# Altium PCB sar20-motor-driver.PcbDoc
Units mm, origin at the board's own origin, x right, y up, seen from the top; angles counter-clockwise.
Board outline 27 x 25.1 mm, 4 copper layers (Top Layer, GND, PWR, Bottom Layer), stack 1.588 mm thick; 63 components, 53 nets, 265 pads, 118 vias.
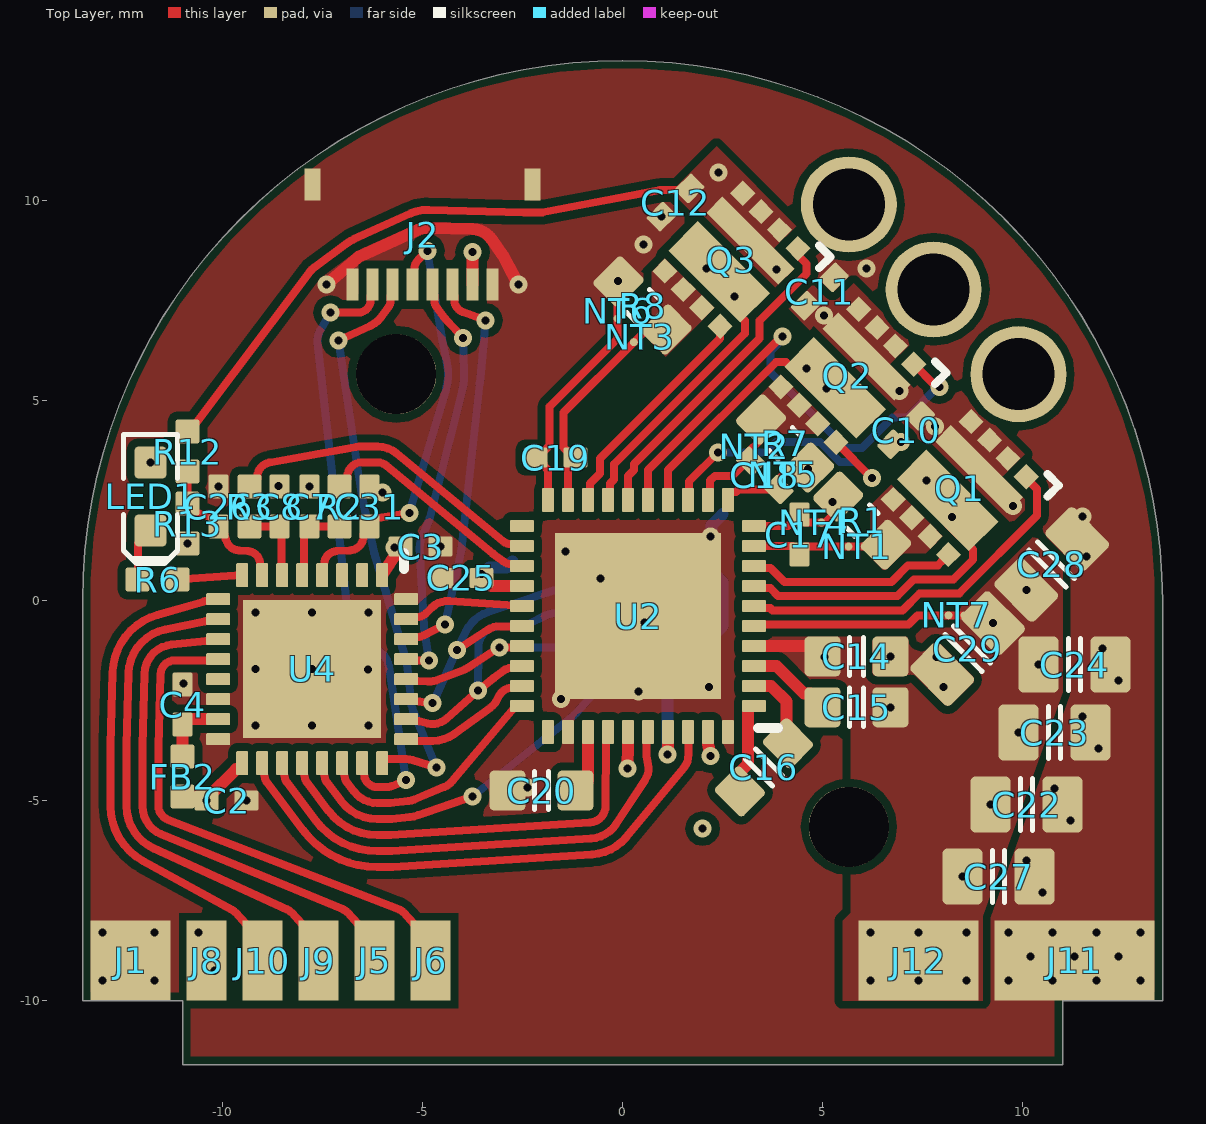
[diagram p0: Top Layer view]
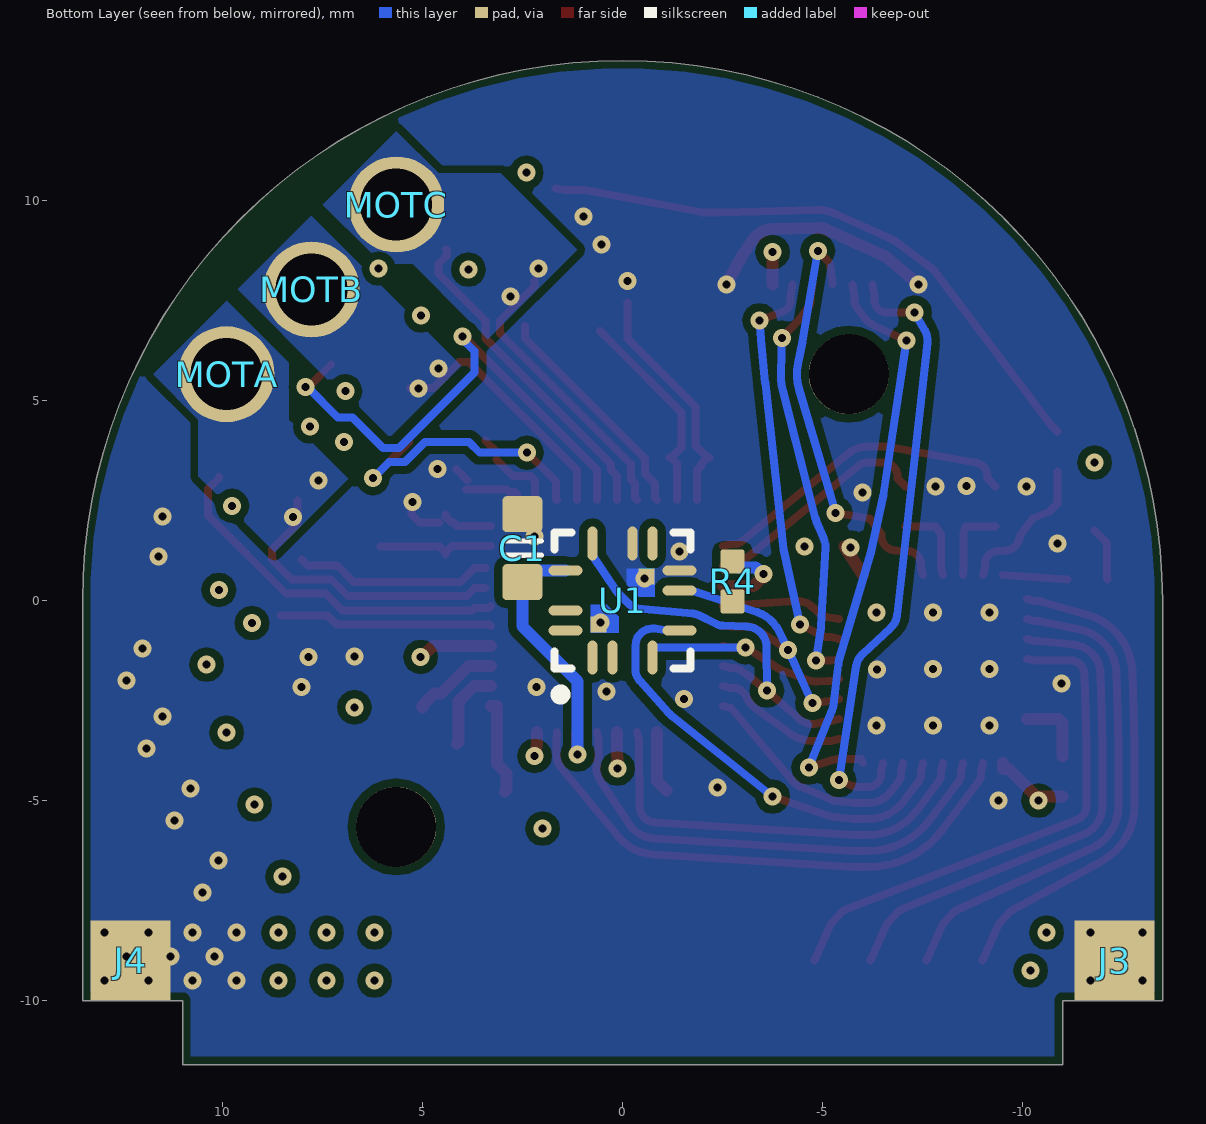
[diagram p1: Bottom Layer view, seen from below]
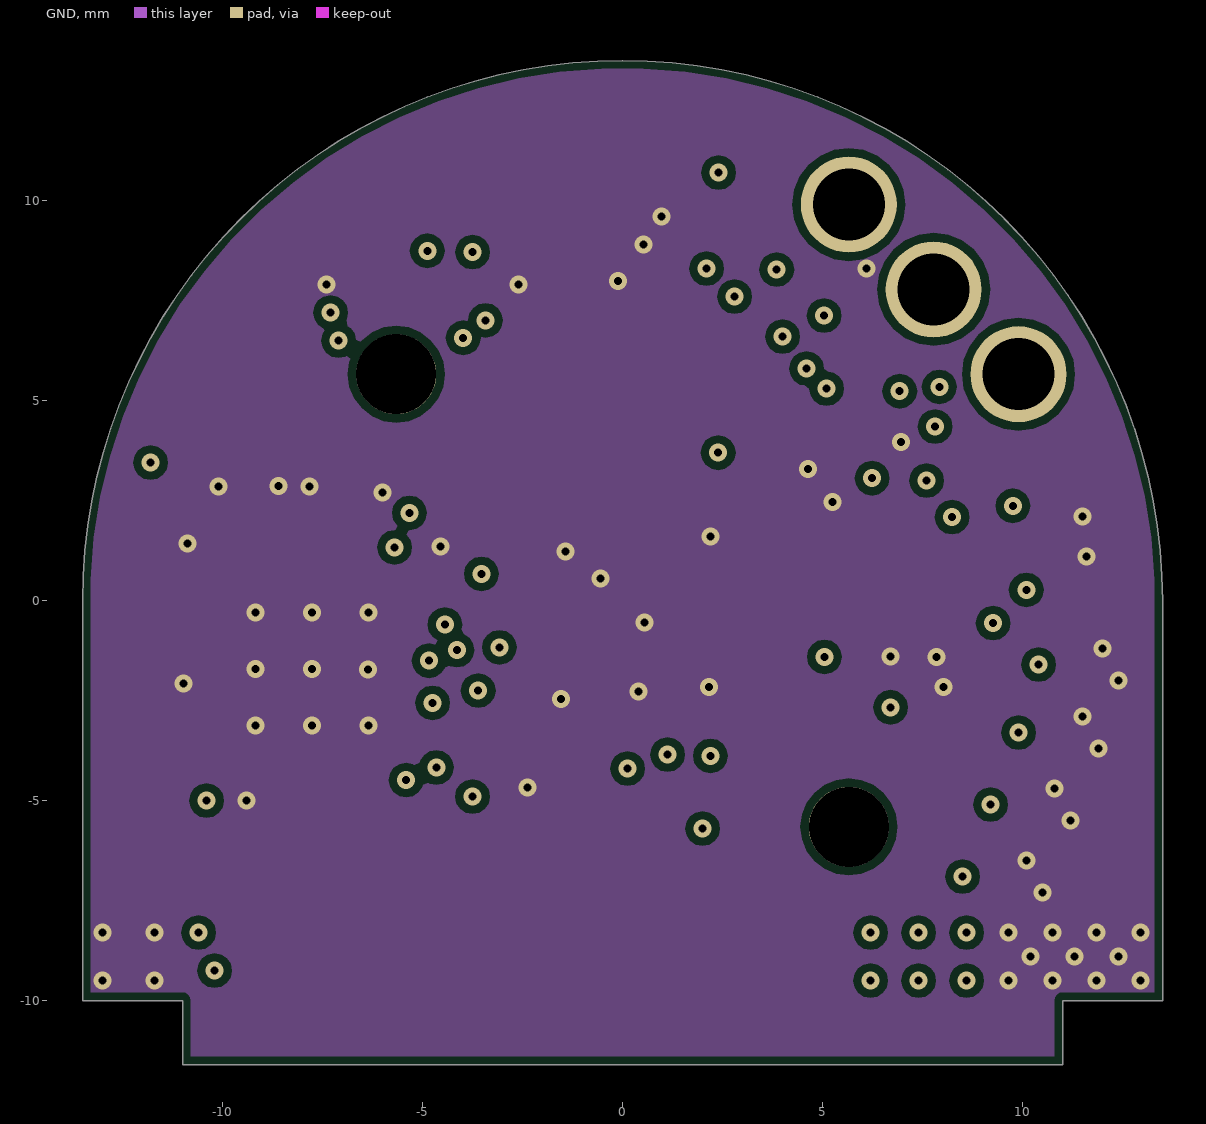
[diagram p2: GND]
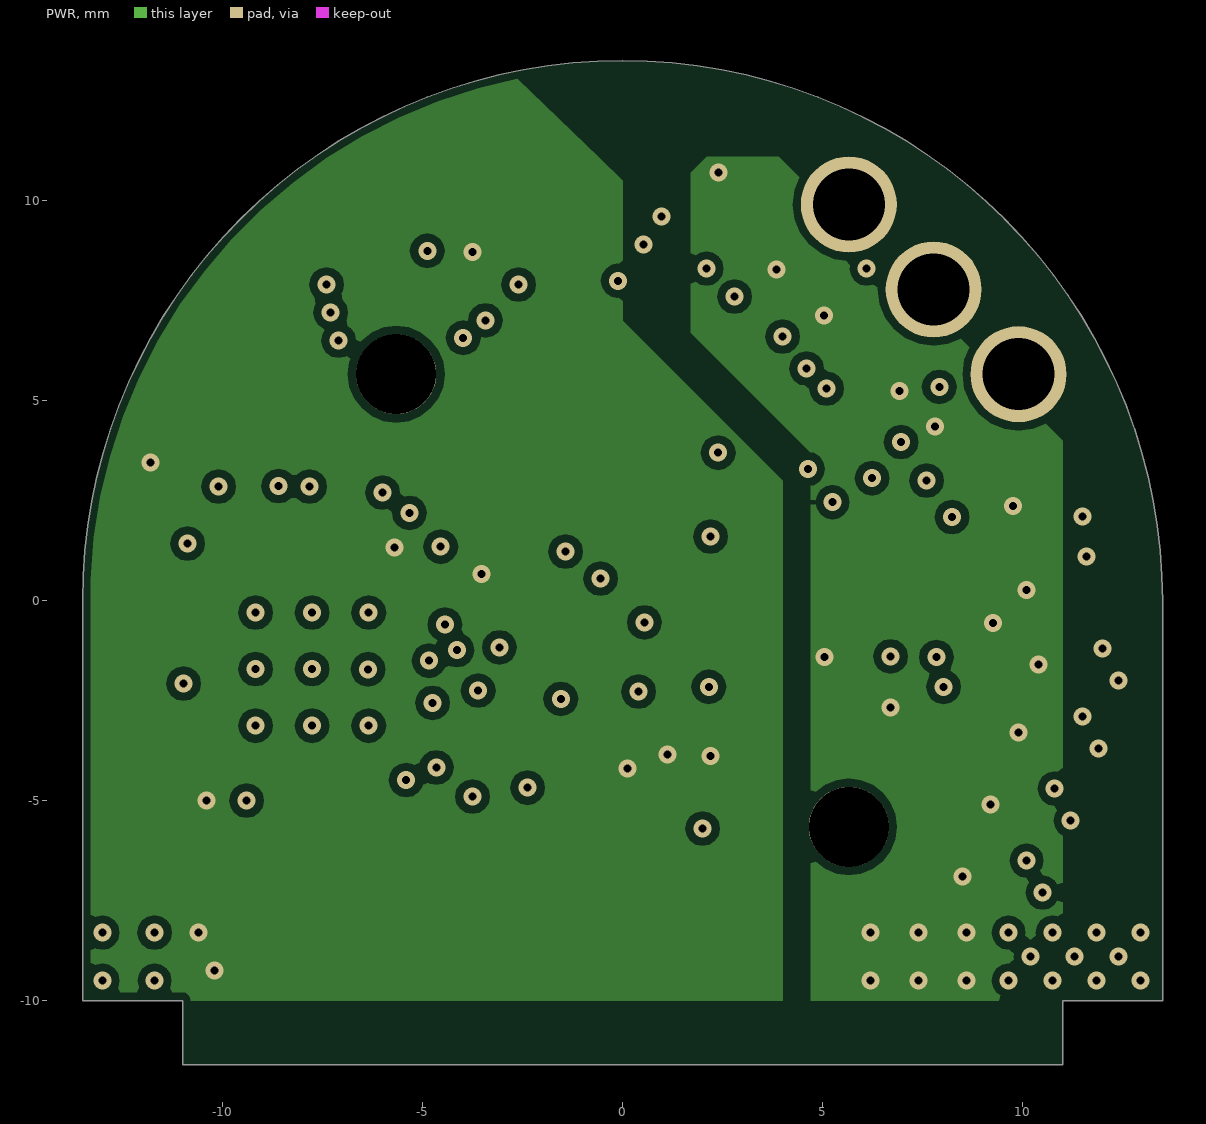
[diagram p3: PWR]
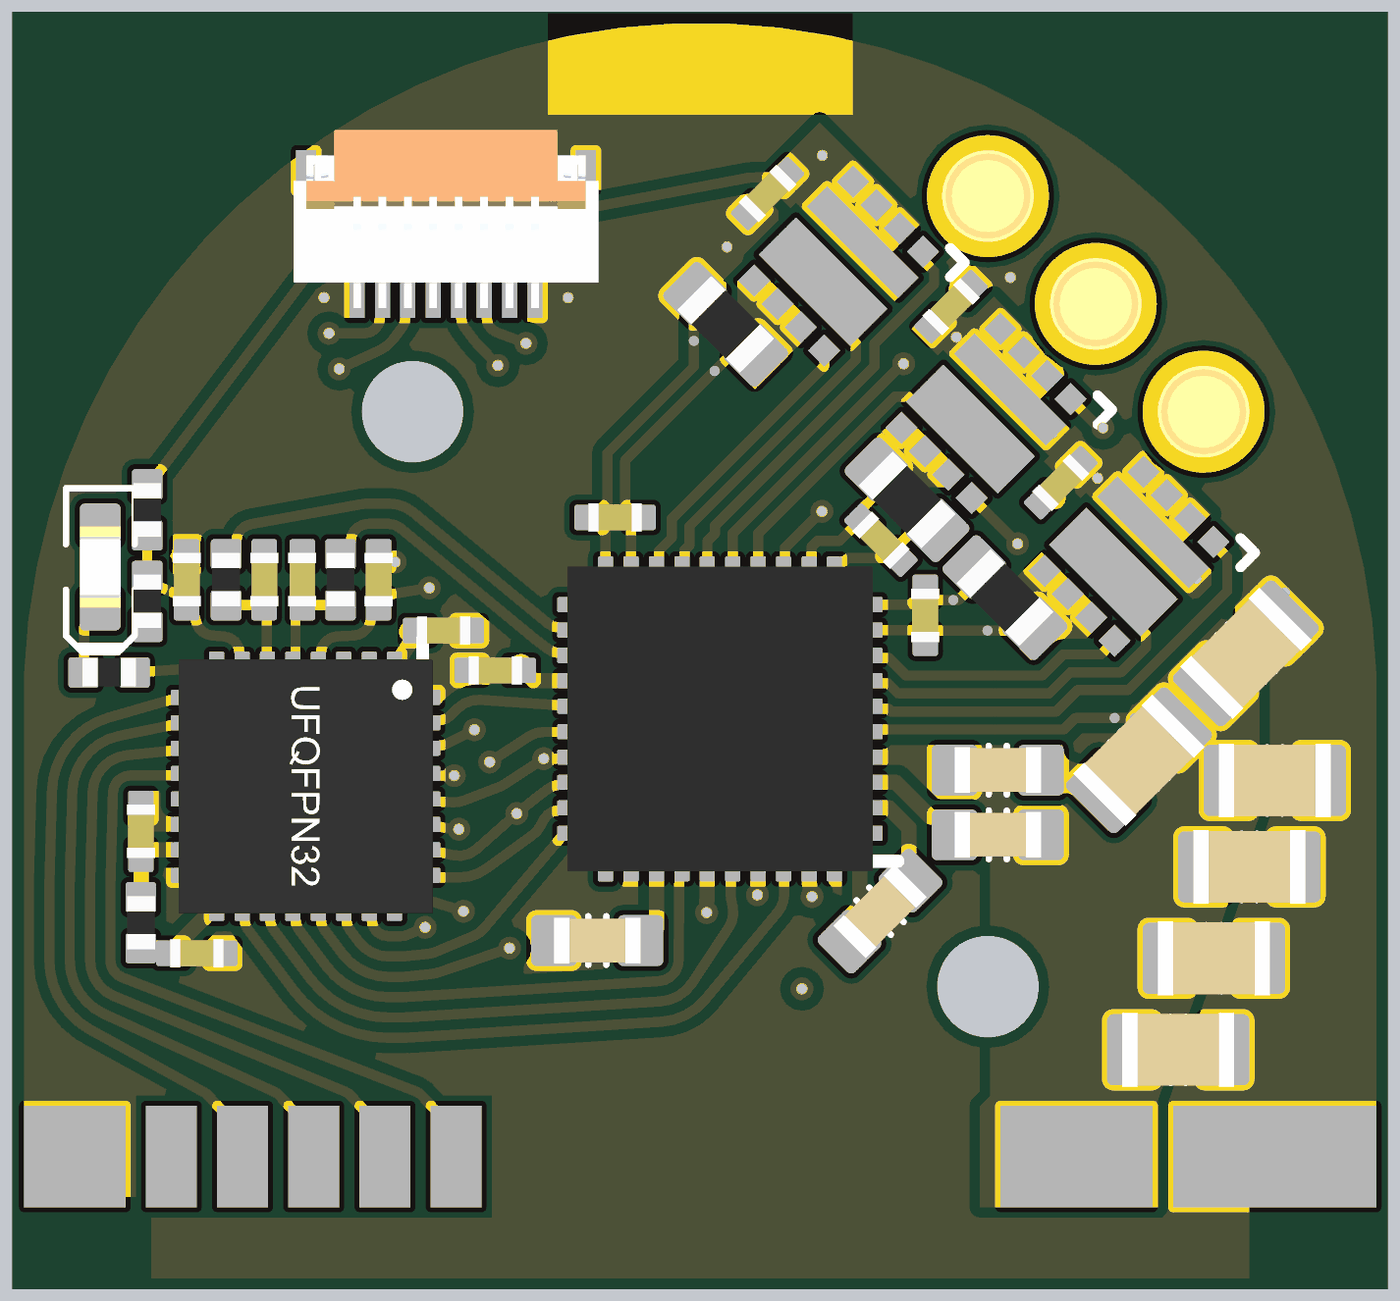
[diagram p4: 3D render of the assembled board from above, using the file's embedded part models]
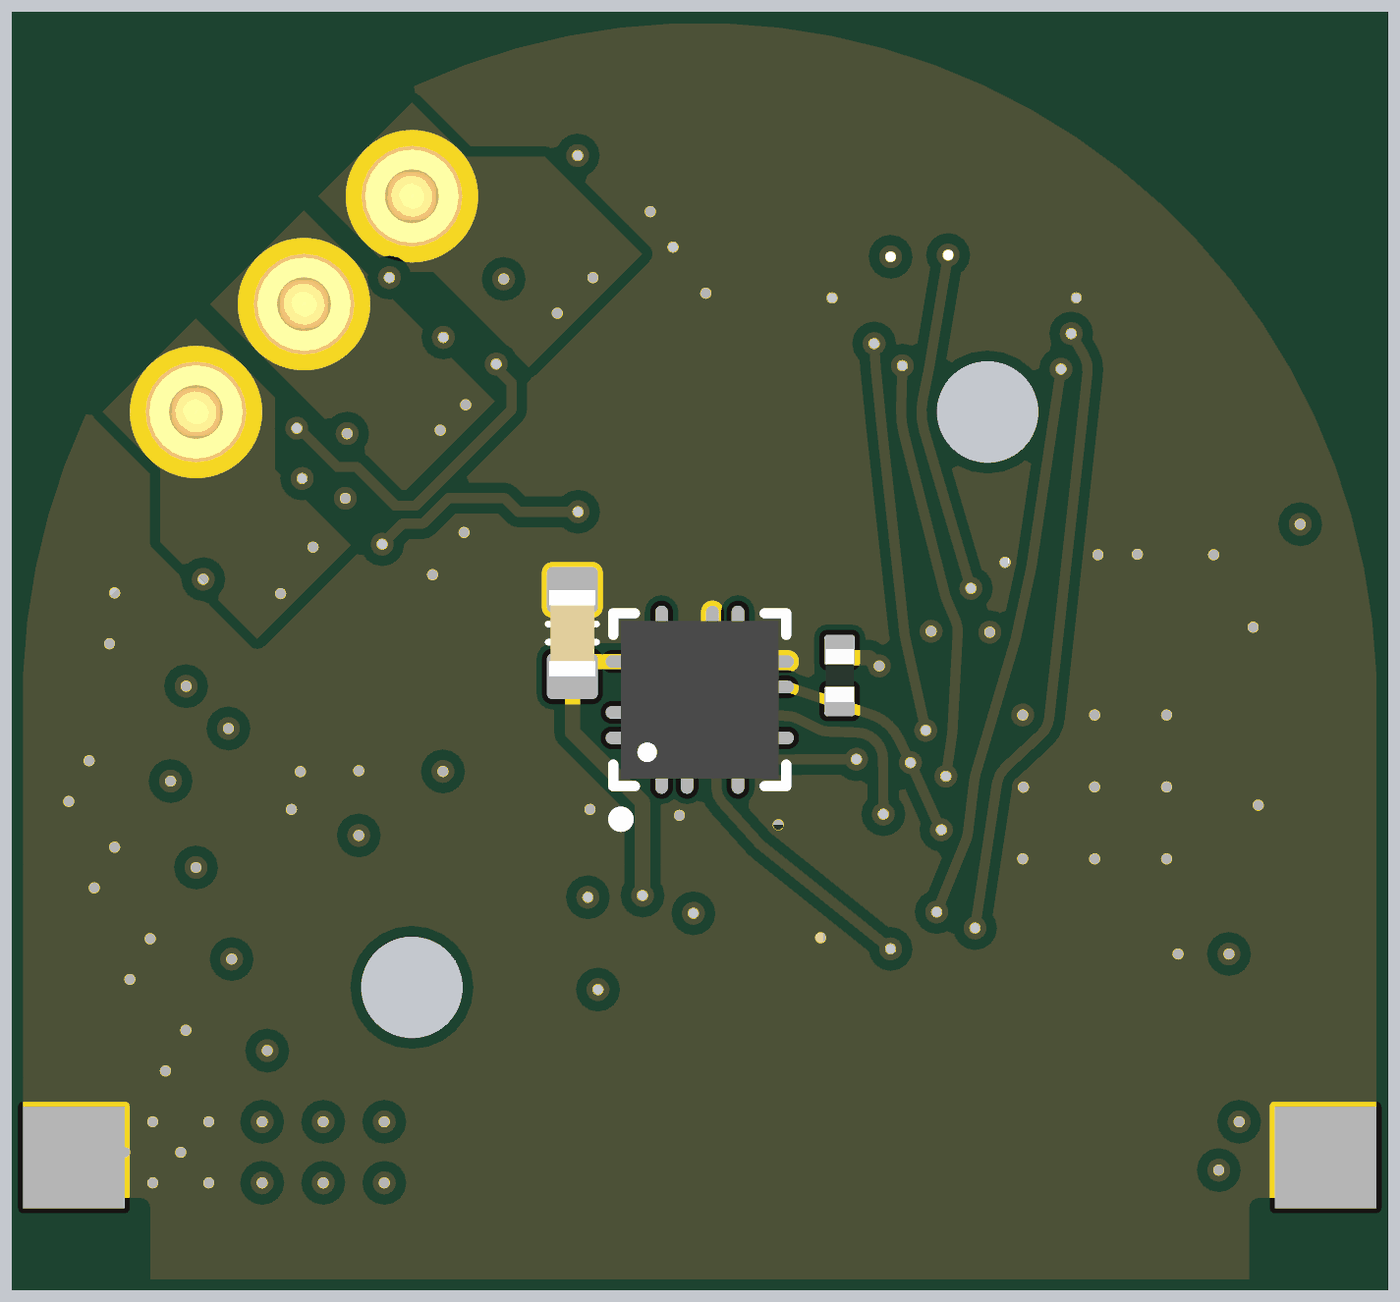
[diagram p5: 3D render of the assembled board from below, using the file's embedded part models]

## Layer stack, top to bottom
Top Solder: solder mask 0.0102, Solder Resist, Dk 3.5
Top Layer: signal copper 0.035
Dielectric 2: prepreg 0.2083, PP-022, Dk 4.5
GND: signal copper 0.018
Dielectric 1: core 1.065, Core-042, Dk 4.6
PWR: signal copper 0.018
Dielectric 3: prepreg 0.2083, PP-022, Dk 4.5
Bottom Layer: signal copper 0.035
Bottom Solder: solder mask 0.0102, Solder Resist, Dk 3.5

## Board outline
-11,-11.6 11,-11.6 11,-10 13.5,-10 13.5,0 ccw(c0,0) 0,13.5 ccw(c0,0) -13.5,0 -13.5,-10 -11,-10

## Design rules (kind name [scope] priority, off if disabled: settings)
BoardOutlineClearance [All] p1: gap=0.2 ignorepadtopadclearanceinfootprint=FALSE except(0: Arc-SplitContinuation Track-SplitContinuation SMDPad-SplitContinuation THPad-SplitContinuation Via-SplitContinuation Fill-SplitContinuation Poly-SplitContinuation Region-SplitContinuation Text-SplitContinuation)
Clearance [All] p1: gap=0.2 ignorepadtopadclearanceinfootprint=FALSE except(0.127: SMDPad-SMDPad; 0.15: Track-Track)
ComponentClearance ComponentClearanceIgnore [Id = 'jd_power_my2813c' vs Id = 'M2x5_torx'] p1: gap=0 collisioncheckmode=3 verticalgap=0 showdistances=FALSE
ComponentClearance [not IsNetTieComponent and not HasFootprint('PAD-2020') and not HasFootprint('PAD-1020') vs not IsNetTieComponent and not HasFootprint('PAD-2020') and not HasFootprint('PAD-1020')] p2: gap=0.19 collisioncheckmode=3 verticalgap=0 showdistances=FALSE
DiffPairsRouting [All] p1: maxlimit=0.2 minlimit=0.2 mostfreqgap=0.2 toplayer_minwidth=0.2 toplayer_maxwidth=0.4 toplayer_prefwidth=0.3 midlayer1_minwidth=0.2 midlayer1_maxwidth=0.4 midlayer1_prefwidth=0.3 midlayer2_minwidth=0.2 midlayer2_maxwidth=0.4 midlayer2_prefwidth=0.3 bottomlayer_minwidth=0.2 bottomlayer_maxwidth=0.4 bottomlayer_prefwidth=0.3 maxuncoupledlength=10
HoleSize [All] p1: absolutevalues=TRUE maxlimit=5 minlimit=0.2 maxpercent=80.000 minpercent=20.000
HoleToHoleClearance [All] p1: gap=0.5 allowstackedmicrovias=FALSE
MinimumSolderMaskSliver [All] p1: minsoldermaskwidth=0.2
PlaneClearance [All] p1: clearance=0.2
PlaneConnect [All] p1: planeconnectstyle=Direct reliefexpansion=0.5 reliefentries=4 reliefconductorwidth=0.3 reliefairgap=0.2
PolygonConnect [All] p1: connectstyle=Direct reliefconductorwidth=0.3 reliefentries=4 polygonreliefangle="90 Angle" airgapwidth=0.2
RoomDefinition sar20-motor-driver [InComponentClass('sar20-motor-driver')] p1: confinementstyle=ConfineIn formatcopy=TRUE lockcomponents=FALSE outline -20,-21 39.6,-21 39.6,25.4 -20,25.4
RoutingVias [All] p1: holewidth=0.2 width=0.45 viastyle="Through Hole" minholewidth=0.2 minwidth=0.45 maxholewidth=3 maxwidth=5
SilkToSilkClearance [All] p1: silktosilkclearance=0.2
SilkToSolderMaskClearance [IsPad] p1: minsilkscreentomaskgap=0.2 clearancetoexposedcopper=TRUE
SolderMaskExpansion SolderMaskExpansionVia [IsVia] p1: expansion=0 istentingtop=TRUE useseparateexpansions=TRUE expansionbottom=0 istentingbottom=TRUE
SolderMaskExpansion [All] p2: expansion=0.1 istentingtop=FALSE
Width [All] p1: maxlimit=5 minlimit=0.2 preferedwidth=0.3
21 further rules are at their usual default settings.

## Components (designator, comment, footprint, x,y, rotation, side; value= is the part's Value field where it differs from the comment)
C1 "1u" CAPC1608X90N 2.504,1.309 r90 bottom
C2 "100n" CAPC1005X55N -9.9,-5 r0 top
C3 "100n" CAPC1005X55N -5.05,1.35 r0 top
C4 "100n" CAPC1005X55N -11,-2.6 r90 top
C7 "2.2n" CAPC1005X55N -7.825,2.35 r90 top
C8 "2.2n" CAPC1005X55N -8.575,2.35 r90 top
C10 "10n" CAPC1005X55N 7.089,4.26 r45 top
C11 "10n" CAPC1005X55N 4.932,7.725 r225 top
C12 "10n" CAPC1005X55N 1.325,9.95 r45 top
C14 "100n" CAPC1608X90N 5.851,-1.397 r0 top
C15 "1u" CAPC1608X90N 5.851,-2.669 r180 top
C16 "47n" CAPC1608X90N 3.536,-4.172 r225 top
C17 "1n" CAPC1005X55N 4.425,1.65 r90 top
C18 "1n" CAPC1005X55N 3.553,3.129 r315 top
C19 "1n" CAPC1005X55N -1.675,3.575 r180 top
C20 "1u" CAPC1608X90N -2.025,-4.75 r180 top
C22 "" CAPC2012X135N 10.1,-5.1 r0 top value=4.7u
C23 "" CAPC2012X135N 10.8,-3.3 r0 top value=4.7u
C24 "" CAPC2012X135N 11.3,-1.6 r0 top value=4.7u
C25 "100n" CAPC1005X55N -4.031,0.566 r180 top
C26 "2.2n" CAPC1005X55N -10.1,2.35 r90 top
C27 "" CAPC2012X135N 9.4,-6.9 r0 top value=4.7u
C28 "" CAPC2012X135N 10.73,0.902 r45 top value=4.7u
C29 "" CAPC2012X135N 8.627,-1.202 r225 top value=4.7u
C31 "100n" CAPC1005X55N -6.325,2.35 r90 top
FB2 "600R" RESC1005X40N -11,-4.4 r270 top
J1 "SOLDER-PAD" PAD-2020 -12.3,-9 r180 top
J2 "DEBUG" HIROSE-FH19C-8S-0.5SH -5,10.4 r180 top
J3 "SOLDER-PAD" PAD-2020 -12.3,-9 r180 bottom
J4 "SOLDER-PAD" PAD-2020 12.3,-9 r180 bottom
J5 "SOLDER-PAD" PAD-1020 -6.2,-9 r0 top
J6 "SOLDER-PAD" PAD-1020 -4.8,-9 r0 top
J8 "SOLDER-PAD" PAD-1020 -10.4,-9 r180 top
J9 "SOLDER-PAD" PAD-1020 -7.6,-9 r180 top
J10 "SOLDER-PAD" PAD-1020 -9,-9 r180 top
J11 "SOLDER-PAD" PAD-4020 11.3,-9 r180 top
J12 "SOLDER-PAD" PAD-3020 7.4,-9 r180 top
LED1 "White" LED-0603-WHITE -11.8,2.6 r270 top
MOTA "POGO-PIN" MILL-MAX_0921-0-15-20-76-14-11-0 9.899,5.657 r45 bottom
MOTB "POGO-PIN" MILL-MAX_0921-0-15-20-76-14-11-0 7.778,7.778 r225 bottom
MOTC "POGO-PIN" MILL-MAX_0921-0-15-20-76-14-11-0 5.657,9.899 r45 bottom
NT1 "NET-TIE" NET-TIE-0206 5.85,1.35 r180 top net-tie
NT2 "NET-TIE" NET-TIE-0206 3.288,3.854 r225 top net-tie
NT3 "NET-TIE" NET-TIE-0206 0.425,6.6 r225 top net-tie
NT4 "NET-TIE" NET-TIE-0206 4.775,1.95 r180 top net-tie
NT5 "NET-TIE" NET-TIE-0206 4.014,3.146 r225 top net-tie
NT6 "NET-TIE" NET-TIE-0206 -0.125,7.25 r270 top net-tie
NT7 "NET-TIE" NET-TIE-0206 8.349,-0.371 r180 top net-tie
Q1 "DMT3009LDT" "V-DFN3030-8 (Type K)" 8.432,2.811 r135 top
Q2 "DMT3009LDT" "V-DFN3030-8 (Type K)" 5.622,5.622 r135 top
Q3 "DMT3009LDT" "V-DFN3030-8 (Type K)" 2.722,8.521 r135 top
R1 "0.1" RESC1608X55N_CURRENT_SENSE 5.993,1.998 r135 top net-tie
R2 "Thick Film" RESC1005X40N -7.075,2.35 r90 top value=56
R3 "Thick Film" RESC1005X40N -9.325,2.35 r90 top value=56
R4 "Thick Film" RESC1005X40N -2.75,0.475 r270 bottom value=1k
R6 "Thick Film" RESC1005X40N -11.625,0.525 r0 top value=1k
R7 "0.1" RESC1608X55N_CURRENT_SENSE 4.066,3.924 r315 top net-tie
R8 "0.1" RESC1608X55N_CURRENT_SENSE 0.5,7.375 r135 top net-tie
R12 "Thick Film" RESC1005X40N -10.875,3.725 r270 top value=34.8k
R13 "Thick Film" RESC1005X40N -10.875,1.925 r270 top value=4.99k
U1 "MA702" MA702_MINIMAL_QFN16 0,0 r90 bottom
U2 "DRV8323S" WQFN_TI_RTA0040B 0.389,-0.389 r180 top
U4 "STM32G431K" UFQFPN32 -7.76,-1.715 r270 top

## Footprints (in the part's own frame and the unit in brackets; to place one, negate y for a bottom-side part, rotate by r counter-clockwise, add the part's x,y. Pads: shape width x height; smd on the part's side, far side on the other; paste and mask are expansions set on the pad)
CAPC1005X55N [mm] "Chip Capacitor, Body 1.0x0.5mm, EIA 0402, IPC Medium Density"
  round 0.2 on Mech15: 0(0,0)
  rrect20% 0.6x0.5 smd: 1(-0.5,0) 2(0.5,0)
  body extent -0.52,-0.27 0.53,0.28, height 0.55
CAPC1608X90N [mm] "Chip Capacitor, Body 1.6x0.8mm, EIA 0603, IPC Medium Density"
  round 0.254 on Mech15: 0(0,0)
  rrect25% 0.9x1 smd: 1(-0.85,0) 2(0.85,0)
  silkscreen extent -0.18,-0.48 0.18,0.48, body extent -0.85,-0.45 0.85,0.45, height 0.89
CAPC2012X135N [mm] "Chip Capacitor, Body 2.0x1.2mm, EIA 0805, IPC Medium Density"
  round 0.254 on Mech15: 0(0,0)
  rrect25% 1x1.4 smd: 1(-0.9,0) 2(0.9,0)
  silkscreen extent -0.15,-0.65 0.15,0.65, body extent -1.1,-0.72 1.1,0.73, height 1.34
HIROSE-FH19C-8S-0.5SH [mm]
  rect 0.3x0.8 smd paste+0 mask+0.102: 1(-1.75,2.5) 2(-1.25,2.5) 3(-0.75,2.5) 4(-0.25,2.5) 5(0.25,2.5) 6(0.75,2.5) 7(1.25,2.5) 8(1.75,2.5)
  rect 0.4x0.8 smd paste+0 mask+0.102: SH(-2.75,0) SH(2.75,0)
  body extent -3,-0.8 3,2.7, height 0.9
LED-0603-WHITE [mm]
  round 0.254 on Mech15: 0(0,0)
  rrect25% 0.8x0.8 smd: A(-0.85,0) K(0.85,0)
  Top Layer pour cut-out: -0.5,0.5 0.5,0.5 0.5,-0.5 -0.5,-0.5
  silkscreen extent -1.55,-0.67 1.68,0.67, body extent -0.8,-0.4 0.8,0.4, height 0.75
MA702_MINIMAL_QFN16 [mm] "QFN, 16-Leads, Body 3,00x3,00mm, Pitch 0,50mm, Thermal Pad 1,65x1,65mm, IPC Medium Density"
  oval 0.85x0.25 smd: 1(-1.425,0.75) 2(-1.425,0.25) 4(-1.425,-0.75) 9(1.425,-0.75) 10(1.425,-0.25) 12(1.425,0.75)
  oval 0.25x0.85 smd: 5(-0.75,-1.425) 7(0.25,-1.425) 8(0.75,-1.425) 13(0.75,1.425) 15(-0.25,1.425) 16(-0.75,1.425)
  rect 0.4x0.4 smd paste+0 mask+0: 17(-0.6,0.6) 18(0.6,-0.6)
  Top Layer region: 0.8,-0.8 0.8,-0.1 0.4,-0.1 0.1,-0.4 0.1,-0.8
  Top Layer region: -0.8,0.8 -0.1,0.8 -0.1,0.4 -0.4,0.1 -0.8,0.1
  silkscreen extent -2.47,-1.7 1.7,1.7, body extent -1.55,-1.55 1.55,1.55, height 1
MILL-MAX_0921-0-15-20-76-14-11-0 [mm]
  round 2.4 hole 1.8 paste+0 mask+0.102: 1(0,0)
  body extent -0.99,-0.99 0.99,0.99, height 1.77
NET-TIE-0206 [mm]
  round 0.2 smd paste+0 mask+0.102: 1(-0.2,0) 2(0.2,0)
  Top Layer lines w0.2: 0.2,0 -0.2,0
PAD-1020 [mm]
  rect 1x2 smd: 1(0,0)
PAD-2020 [mm]
  rect 2x2 smd: 1(0,0)
PAD-3020 [mm]
  rect 3x2 smd: 1(0,0)
PAD-4020 [mm]
  rect 4x2 smd: 1(0,0)
RESC1005X40N [mm] "Chip Resistor, Body 1.0x0.5mm, EIA 0402, IPC Medium Density"
  round 0.2 on Mech15: 0(0,0)
  rrect20% 0.6x0.6 smd: 1(-0.5,0) 2(0.5,0)
  Top Layer pour cut-out: -0.325,0.375 -0.2,0.5 0.2,0.5 0.325,0.375 0.325,-0.375 0.2,-0.5 -0.2,-0.5 -0.325,-0.375
  body extent -0.52,-0.27 0.53,0.28, height 0.4
RESC1608X55N_CURRENT_SENSE [mm] "Chip Resistor, Body 1.6x0.8mm, EIA 0603, IPC Medium Density"
  round 0.254 on Mech15: 0(0,0)
  rrect25% 0.9x1 smd: 1(-0.85,0) 2(0.85,0)
  silkscreen extent -0.15,-0.41 0.15,0.41, body extent -0.87,-0.47 0.88,0.48, height 0.54
UFQFPN32 [mm]
  rrect20% 0.6x0.3 smd: 1(-2.35,1.75) 2(-2.35,1.25) 3(-2.35,0.75) 4(-2.35,0.25) 5(-2.35,-0.25) 6(-2.35,-0.75) 7(-2.35,-1.25) 8(-2.35,-1.75) 17(2.35,-1.75) 18(2.35,-1.25) 19(2.35,-0.75) 20(2.35,-0.25) 21(2.35,0.25) 22(2.35,0.75) 23(2.35,1.25) 24(2.35,1.75)
  rrect20% 0.3x0.6 smd: 9(-1.75,-2.35) 10(-1.25,-2.35) 11(-0.75,-2.35) 12(-0.25,-2.35) 13(0.25,-2.35) 14(0.75,-2.35) 15(1.25,-2.35) 16(1.75,-2.35) 25(1.75,2.35) 26(1.25,2.35) 27(0.75,2.35) 28(0.25,2.35) 29(-0.25,2.35) 30(-0.75,2.35) 31(-1.25,2.35) 32(-1.75,2.35)
  rect 3.45x3.45 smd: 33(0,0)
  silkscreen extent -2.9,2.3 -2.5,2.3, body extent -2.5,-2.5 2.5,2.5, height 0.55
"V-DFN3030-8 (Type K)" [mm]
  rect 0.45x0.45 smd paste+0 mask+0.102: DH(-0.325,-1.375) DH(0.325,-1.375) DH(0.975,-1.375) GH(-0.975,-1.375) GL(-0.975,1.375) SL(-0.325,1.375) SL(0.325,1.375) SL(0.975,1.375)
  rect 2.55x0.566 smd paste+0 mask+0.102: DH(0,-0.672)
  rect 2.55x1.044 smd paste+0 mask+0.102: SW(0,0.433)
  silkscreen extent -1.7,-1.8 -1.3,-1.4, body extent -1.5,-1.5 1.5,1.5, height 0.85
WQFN_TI_RTA0040B [mm]
  rrect20% 0.6x0.3 smd: 1(-2.9,2.25) 2(-2.9,1.75) 3(-2.9,1.25) 4(-2.9,0.75) 5(-2.9,0.25) 6(-2.9,-0.25) 7(-2.9,-0.75) 8(-2.9,-1.25) 9(-2.9,-1.75) 10(-2.9,-2.25) 21(2.9,-2.25) 22(2.9,-1.75) 23(2.9,-1.25) 24(2.9,-0.75) 25(2.9,-0.25) 26(2.9,0.25) 27(2.9,0.75) 28(2.9,1.25) 29(2.9,1.75) 30(2.9,2.25)
  rrect20% 0.3x0.6 smd: 11(-2.25,-2.9) 12(-1.75,-2.9) 13(-1.25,-2.9) 14(-0.75,-2.9) 15(-0.25,-2.9) 16(0.25,-2.9) 17(0.75,-2.9) 18(1.25,-2.9) 19(1.75,-2.9) 20(2.25,-2.9) 31(2.25,2.9) 32(1.75,2.9) 33(1.25,2.9) 34(0.75,2.9) 35(0.25,2.9) 36(-0.25,2.9) 37(-0.75,2.9) 38(-1.25,2.9) 39(-1.75,2.9) 40(-2.25,2.9)
  rect 4.15x4.15 smd: 41(0,0)
  silkscreen extent -3.5,2.8 -3,2.8, body extent -3,-3 3,3, height 1

## Part data
C1 C2 C3 C4 C7 C8 C10 C11 C12 C17 C18 C19 C26 C31: library part CAPC, "Capacitor SMD Cer 1nF 10% 16V X7R 0402", Manufacturer 1="AVX Corporation", Manufacturer 2=Yageo, Manufacturer Part Number 1=0402YC102KAT2A, Manufacturer Part Number 2=CC0402KRX7R7BB102, Operating Temperature="-55°C ~ 125°C", Package / Case="0402 (1005 Metric)", Ratings="16V; X7R", Supplier Part Number 1=478-6197-1-ND, Tolerance=±10%, ComponentLink1Description=http://www.avx.com/docs/Catalogs/cx7r.pdf, ComponentLink1URL=http://www.avx.com/docs/Catalogs/cx7r.pdf, ComponentLink2Description=http://www.yageo.com/documents/recent/UPY-GPHC_X7R_6.3V-to-50V_8.pdf, ComponentLink2URL=http://www.yageo.com/documents/recent/UPY-GPHC_X7R_6.3V-to-50V_8.pdf, SCDType=spec, Size / Dimension="0.039\" L x 0.020\" W (1.00mm x 0.50mm)", Supplier 1=Digi-Key, Supplier 2=Digi-Key, Supplier Part Number 2=311-1352-1-ND
C14: library part CAPC, "Capacitor SMD Cer 1nF 10% 16V X7R 0402", Manufacturer 1="AVX Corporation", Manufacturer 2=Yageo, Manufacturer Part Number 1=0402YC102KAT2A, Manufacturer Part Number 2=CC0402KRX7R7BB102, Operating Temperature="-55°C ~ 125°C", Package / Case="0402 (1005 Metric)", Ratings=25V, Supplier Part Number 1=478-6197-1-ND, Tolerance=±10%, ComponentLink1Description=http://www.avx.com/docs/Catalogs/cx7r.pdf, ComponentLink1URL=http://www.avx.com/docs/Catalogs/cx7r.pdf, ComponentLink2Description=http://www.yageo.com/documents/recent/UPY-GPHC_X7R_6.3V-to-50V_8.pdf, ComponentLink2URL=http://www.yageo.com/documents/recent/UPY-GPHC_X7R_6.3V-to-50V_8.pdf, SCDType=spec, Size / Dimension="0.039\" L x 0.020\" W (1.00mm x 0.50mm)", Supplier 1=Digi-Key, Supplier 2=Digi-Key, Supplier Part Number 2=311-1352-1-ND
C15: library part CAPC, "Capacitor SMD Cer 1nF 10% 16V X7R 0402", Manufacturer 1="AVX Corporation", Manufacturer 2=Yageo, Manufacturer Part Number 1=0402YC102KAT2A, Manufacturer Part Number 2=CC0402KRX7R7BB102, Operating Temperature="-55°C ~ 125°C", Package / Case="0402 (1005 Metric)", Ratings="16V X7R", Supplier Part Number 1=478-6197-1-ND, Tolerance=±10%, ComponentLink1Description=http://www.avx.com/docs/Catalogs/cx7r.pdf, ComponentLink1URL=http://www.avx.com/docs/Catalogs/cx7r.pdf, ComponentLink2Description=http://www.yageo.com/documents/recent/UPY-GPHC_X7R_6.3V-to-50V_8.pdf, ComponentLink2URL=http://www.yageo.com/documents/recent/UPY-GPHC_X7R_6.3V-to-50V_8.pdf, SCDType=spec, Size / Dimension="0.039\" L x 0.020\" W (1.00mm x 0.50mm)", Supplier 1=Digi-Key, Supplier 2=Digi-Key, Supplier Part Number 2=311-1352-1-ND
C16: library part CAPC, "Capacitor SMD Cer 1nF 10% 16V X7R 0402", Manufacturer 1="AVX Corporation", Manufacturer 2=Yageo, Manufacturer Part Number 1=0402YC102KAT2A, Manufacturer Part Number 2=CC0402KRX7R7BB102, Operating Temperature="-55°C ~ 125°C", Package / Case="0402 (1005 Metric)", Ratings="25V X7R", Supplier Part Number 1=478-6197-1-ND, Tolerance=±10%, ComponentLink1Description=http://www.avx.com/docs/Catalogs/cx7r.pdf, ComponentLink1URL=http://www.avx.com/docs/Catalogs/cx7r.pdf, ComponentLink2Description=http://www.yageo.com/documents/recent/UPY-GPHC_X7R_6.3V-to-50V_8.pdf, ComponentLink2URL=http://www.yageo.com/documents/recent/UPY-GPHC_X7R_6.3V-to-50V_8.pdf, SCDType=spec, Size / Dimension="0.039\" L x 0.020\" W (1.00mm x 0.50mm)", Supplier 1=Digi-Key, Supplier 2=Digi-Key, Supplier Part Number 2=311-1352-1-ND
C20 C25: library part CAPC, "Capacitor SMD Cer 1nF 10% 16V X7R 0402", Manufacturer 1="AVX Corporation", Manufacturer 2=Yageo, Manufacturer Part Number 1=0402YC102KAT2A, Manufacturer Part Number 2=CC0402KRX7R7BB102, Operating Temperature="-55°C ~ 125°C", Package / Case="0402 (1005 Metric)", Ratings="6.3V X7R", Supplier Part Number 1=478-6197-1-ND, Tolerance=±10%, ComponentLink1Description=http://www.avx.com/docs/Catalogs/cx7r.pdf, ComponentLink1URL=http://www.avx.com/docs/Catalogs/cx7r.pdf, ComponentLink2Description=http://www.yageo.com/documents/recent/UPY-GPHC_X7R_6.3V-to-50V_8.pdf, ComponentLink2URL=http://www.yageo.com/documents/recent/UPY-GPHC_X7R_6.3V-to-50V_8.pdf, SCDType=spec, Size / Dimension="0.039\" L x 0.020\" W (1.00mm x 0.50mm)", Supplier 1=Digi-Key, Supplier 2=Digi-Key, Supplier Part Number 2=311-1352-1-ND
C22 C23 C24 C27 C28 C29: library part CAPC_4u7_0805, "Capacitor SMD Cer 4.7uF 10% 16V X5R 0805", Manufacturer 1="Taiyo Yuden", Manufacturer 2="Samsung Electro-Mechanics America, Inc", Manufacturer 3=Kemet, Manufacturer 4="Murata Electronics North America", Manufacturer 5="TDK Corporation", Manufacturer Part Number 1=EMK212BJ475KG-T, Manufacturer Part Number 2=CL21A475KOFNNNE, Manufacturer Part Number 3=C0805C475K4PACTU, Manufacturer Part Number 4=GRM21BR61C475MA88L, Manufacturer Part Number 5=C2012X5R1C475K125AC, Operating Temperature="-55°C ~ 85°C", Package / Case="0805 (2012 Metric)", Ratings=25V, Supplier Part Number 1=587-1294-1-ND, Tolerance=±10%, ComponentLink1Description=http://www.yuden.co.jp/productdata/catalog/en/mlcc01_e.pdf, ComponentLink1URL=http://www.yuden.co.jp/productdata/catalog/en/mlcc01_e.pdf, ComponentLink2Description=http://www.samsungsem.com/servlet/FileDownload?type=spec&file=CL21A475KOFNNNE.pdf, ComponentLink2URL=http://www.samsungsem.com/servlet/FileDownload?type=spec&file=CL21A475KOFNNNE.pdf, ComponentLink3Description=http://capacitoredge.kemet.com/capedge2/DataSheet?pn=C0805C475K4PACTU, ComponentLink3URL=http://capacitoredge.kemet.com/capedge2/DataSheet?pn=C0805C475K4PACTU, ComponentLink4Description=http://psearch.murata.com/capacitor/product/GRM21BR61C475MA88#.pdf, ComponentLink4URL=http://psearch.murata.com/capacitor/product/GRM21BR61C475MA88#.pdf, ComponentLink5Description=http://product.tdk.com/capacitor/mlcc/en/documents/mlcc_commercial_general_en.pdf, ComponentLink5URL=http://product.tdk.com/capacitor/mlcc/en/documents/mlcc_commercial_general_en.pdf, Material=ceramic, RoHS 1="RoHS Compliant", RoHS 2="RoHS Compliant", RoHS 3="RoHS Compliant", RoHS 4="RoHS Compliant", RoHS 5="RoHS Compliant", SCDType=spec, Size / Dimension="0.079\" L x 0.049\" W (2.00mm x 1.25mm)", Supplier 1=Digi-Key, Supplier 2=Digi-Key, Supplier 3=Digi-Key, Supplier 4=Digi-Key, Supplier 5=Digi-Key, Supplier Part Number 2=1276-1065-1-ND, Supplier Part Number 3=399-8101-1-ND, Supplier Part Number 4=490-7215-1-ND, Supplier Part Number 5=445-7640-1-ND, Thickness (Max)="0.053\" (1.35mm)"
FB2: library part FERRITE_BEAD
J2: library part FPC-CONNECTOR
LED1: library part LED_SMD_White_0603_Bright, "LED 0603 SMD Bright White 8700K", Luminous Flux @ Current - Test=-, Manufacturer 1="Lite-On Inc", Manufacturer 2="Kingbright Corp", Manufacturer Part Number 1=LTW-C193TS5, Manufacturer Part Number 2=APT1608QWF/D, Millicandela Rating=230mcd, Package / Case="0603 (1608 metric)", Ratings="Ultra Bright; 8700K", Supplier Part Number 1=160-1721-1-ND, Voltage - Forward (Vf) @ 10mA=3.0V, Voltage - Forward (Vf) Typ=3.3V, Color=White, ComponentLink1Description=http://media.digikey.com/pdf/Data%20Sheets/Lite-On%20PDFs/LTW-C193TS5.pdf, ComponentLink1URL=http://media.digikey.com/pdf/Data%20Sheets/Lite-On%20PDFs/LTW-C193TS5.pdf, ComponentLink2Description=http://www.kingbrightusa.com/images/catalog/SPEC/APT1608QWF-D.pdf, ComponentLink2URL=http://www.kingbrightusa.com/images/catalog/SPEC/APT1608QWF-D.pdf, Lens Style/Size="Rectangle with Flat Top, 0.8mm x 1.1mm", Lens Type="Clear, Tinted", Material=InGaN, Mounting Type="Surface Mount", SCDType=source, Size / Dimension="1.60mm L x 0.80mm W", Supplier 1=Digi-Key, Supplier 2=Digi-Key, Supplier Part Number 2=APT1608QWF/D-ND, Viewing Angle=120°
R1 R7 R8: library part RESISTOR_CURRENT_SENSE
R2 R3 R12 R13: library part RES_68R_0402_5%, "Resistor SMD chip 68 Ohm 0.063W 5% 0402", Manufacturer 1=Yageo, Manufacturer 2="Samsung Electro-Mechanics America, Inc", Manufacturer 3="Stackpole Electronics Inc", Manufacturer 4="Rohm Semiconductor", Manufacturer Part Number 1=RC0402JR-0768RL, Manufacturer Part Number 2=RC1005J680CS, Manufacturer Part Number 3=RMCF0402JT68R0, Manufacturer Part Number 4=MCR01MRTJ680, Package / Case="0402 (1005 Metric)", Ratings="1/16 W", Supplier Part Number 1=311-68JRCT-ND, Tolerance=±5%, ComponentLink1Description=http://www.yageo.com/documents/recent/PYu-RC0402_51_RoHS_L_6.pdf, ComponentLink1URL=http://www.yageo.com/documents/recent/PYu-RC0402_51_RoHS_L_6.pdf, ComponentLink2Description=http://www.samsungsem.com/servlet/FileDownload?filename=productcatalog/pdf/Chip_Resistor.pdf, ComponentLink2URL=http://www.samsungsem.com/servlet/FileDownload?filename=productcatalog/pdf/Chip_Resistor.pdf, ComponentLink3Description=http://www.seielect.com/Catalog/SEI-RMCF_RMCP.pdf, ComponentLink3URL=http://www.seielect.com/Catalog/SEI-RMCF_RMCP.pdf, ComponentLink4Description=http://rohmfs.rohm.com/en/products/databook/datasheet/passive/resistor/chip_resistor/mcr_g.pdf, ComponentLink4URL=http://rohmfs.rohm.com/en/products/databook/datasheet/passive/resistor/chip_resistor/mcr_g.pdf, RoHS 1="RoHS Compliant", RoHS 2="RoHS Compliant", RoHS 3="RoHS Compliant", RoHS 4="RoHS Compliant", SCDType=spec, Supplier 1=Digi-Key, Supplier 2=Digi-Key, Supplier 3=Digi-Key, Supplier 4=Digi-Key, Supplier Part Number 2=1276-4348-1-ND, Supplier Part Number 3=RMCF0402JT68R0CT-ND, Supplier Part Number 4=RHM68CECT-ND
R4 R6: library part RES_1K_0402_5%, "Resistor SMD chip 1k Ohm 0.063W 5% 0402", Manufacturer 1=Yageo, Manufacturer 2="Vishay Dale", Manufacturer 3="Samsung Electro-Mechanics America, Inc", Manufacturer 4="Rohm Semiconductor", Manufacturer 5="Panasonic Electronic Components", Manufacturer Part Number 1=RC0402JR-071KL, Manufacturer Part Number 2=CRCW04021K00JNED, Manufacturer Part Number 3=RC1005J102CS, Manufacturer Part Number 4=MCR01MRTJ102, Manufacturer Part Number 5=ERJ-2GEJ102X, Package / Case="0402 (1005 Metric)", Ratings="1/16 W", Supplier Part Number 1=311-1.0KJRCT-ND, Tolerance=±5%, ComponentLink1Description=http://www.yageo.com/documents/recent/PYu-RC0402_51_RoHS_L_6.pdf, ComponentLink1URL=http://www.yageo.com/documents/recent/PYu-RC0402_51_RoHS_L_6.pdf, ComponentLink2Description=http://www.vishay.com/doc?20035, ComponentLink2URL=http://www.vishay.com/doc?20035, ComponentLink3Description=http://www.samsungsem.com/servlet/FileDownload?filename=productcatalog/pdf/Chip_Resistor.pdf, ComponentLink3URL=http://www.samsungsem.com/servlet/FileDownload?filename=productcatalog/pdf/Chip_Resistor.pdf, ComponentLink4Description=http://rohmfs.rohm.com/en/products/databook/datasheet/passive/resistor/chip_resistor/mcr_g.pdf, ComponentLink4URL=http://rohmfs.rohm.com/en/products/databook/datasheet/passive/resistor/chip_resistor/mcr_g.pdf, ComponentLink5Description=http://industrial.panasonic.com/www-cgi/jvcr13pz.cgi?E+PZ+3+AOA0001+ERJ2GEJ102X+7+WW, ComponentLink5URL=http://industrial.panasonic.com/www-cgi/jvcr13pz.cgi?E+PZ+3+AOA0001+ERJ2GEJ102X+7+WW, RoHS 1="RoHS Compliant", RoHS 2="RoHS Compliant", RoHS 3="RoHS Compliant", RoHS 4="RoHS Compliant", RoHS 5="RoHS Compliant", SCDType=spec, Supplier 1=Digi-Key, Supplier 2=Digi-Key, Supplier 3=Digi-Key, Supplier 4=Digi-Key, Supplier 5=Digi-Key, Supplier Part Number 2=541-1.0KJCT-ND, Supplier Part Number 3=1276-4376-1-ND, Supplier Part Number 4=RHM1.0KCECT-ND, Supplier Part Number 5=P1.0KJCT-ND
U1: library part MA702_MINIMAL

## Free pads (board coordinates)
  round 2 hole 2 unplated paste+0 mask+0: hole(-5.657,5.657) hole(5.657,-5.657)

## Via types
v1: diameter 0.45, hole 0.2, Top Layer to Bottom Layer, tented both sides, 118 vias

## Nets (pads, with @x,y where several pads share a name; then routed paths per layer and width w, separated by ;. In a path a pad name is that pad's centre, name@x,y a point inside that pad or via, vN(x,y) a via of type N, cw(c..) or ccw(c..) an arc to the next point about the centre after c; other vN are vias at no path point)
+3.3: C1.1 C2.1 C3.1 C25.1 FB2.2 J2.2 J8.1 LED1.A R4.1 U1.13 U2.24 U2.35 U2.37 U2.39 U4.1 U4.17 | length 13.8
  Top Layer w0.3: FB2.2 -10.346,-4.9 -9.66,-4.215 -9.51,-4.215 U4.17 ; U4.1 -5.604,1.266 C3.1 ; J2.2 v1(-3.75,8.709) ; v1(-3.529,0.664) -3.529,0.566 -3.481,0.566 -3.276,0.361 U2.24 ; v1(0.125,-4.2) 0.139,-3.568 ccw(c-0.241,-3.559) 0.139,-3.559 U2.35 ; v1(1.125,-3.85) 1.138,-3.578 ccw(c0.759,-3.559) 1.139,-3.559 U2.37 ; U2.39 2.139,-3.559 ccw(c2.519,-3.559) 2.147,-3.637 v1(2.199,-3.885)
  Bottom Layer w0.3: v1(-3.529,0.664) -3.488,0.664 -3.327,0.825 -2.9,0.825 R4.1 ; v1(1.125,-3.85) 1.125,-2.022 2.504,-0.643 C1.1 2.3,0.663 ccw(c2.088,0.451) 2.088,0.751 1.447,0.751 ccw(c1.449,0.451) U1.13
  other v1: -10.2,-9.25 -10.6,-8.3 -10.4,-5 -5.7,1.327 -11.8,3.45
+16: C10.2 C11.2 C12.2 C14.1 C15.1 C22.1 C23.1 C24.1 C27.1 C28.1 C29.1 J12.1 NT7.1 Q1.DH Q2.DH Q3.DH R12.1 U2.4 | length 16.9
  Top Layer w0.2: R12.1 -10.675,4.425 -7.819,8.216 cw(c-7.4,7.9) -7.713,8.322 -6.877,8.942 cw(c-6.4,8.3) -6.731,9.028 -5.307,9.676 cw(c-4.881,8.743) -4.85,9.768 -2.459,9.7 ccw(c-2.45,10) -2.45,9.7 -2.05,9.7 ccw(c-2.05,10) -1.994,9.705 0.942,10.259 cw(c1.007,9.915) 1.004,10.265 1.431,10.268 C12.2
  Top Layer w0.3: U2.4 4.744,-1.139 5.015,-1.41 v1(5.047,-1.41)
  other v1: 6.2,-9.5 7.4,-9.5 8.6,-9.5 6.2,-8.3 7.4,-8.3 8.6,-8.3 8.5,-6.9 9.2,-5.1 9.9,-3.3 6.701,-2.669 10.4,-1.6 9.263,-0.566 10.094,0.265 9.758,2.369 7.814,4.349 6.93,5.233 5.038,7.124 3.854,8.273 2.4,10.7
AVDD: C4.1 FB2.1 U4.15 | length 1.8
  Top Layer w0.3: FB2.1 C4.1 -11,-3.065 -10.9,-2.965 U4.15
DRV_CSn: U2.29 U4.25 | length 3.4
  Top Layer w0.2: U4.25 -5.21,-3.509 -4.748,-3.509 ccw(c-4.748,-2.584) -4.205,-3.333 -3.3,-2.675 ccw(c-3.608,-2.251) -3.147,-2.501 -3.071,-2.362 cw(c-2.781,-2.519) -2.781,-2.189 -2.711,-2.189 U2.29
DRV_EN: U2.30 U4.22 | length 6.1
  Top Layer w0.2: U4.22 -6.96,-4.265 -6.96,-4.335 ccw(c-6.63,-4.335) -6.894,-4.533 -6.714,-4.773 ccw(c-6.13,-4.335) -6.13,-5.065 -5.89,-5.065 ccw(c-5.89,-4.335) -5.814,-5.061 -5.353,-5.012 ccw(c-5.409,-4.49) -5.206,-4.974 -4.452,-4.658 ccw(c-4.656,-4.174) -4.255,-4.513 -2.711,-2.689 U2.30
DVDD: C20.1 U2.33 | length 1.6
  Top Layer w0.3: C20.1@-1.1,-4.75 -0.861,-4.511 U2.33
GHA: Q1.GH U2.6 | length 9.2
  Top Layer w0.2: U2.6 3.339,-0.189 3.696,-0.189 3.753,-0.247 7.001,-0.247 7.429,0.181 8.419,0.181 10.364,2.126 10.364,2.787 10.094,3.057 Q1.GH
GHB: Q2.GH U2.15 | length 13.1
  Top Layer w0.2: U2.15 0.639,3.266 3.986,6.614 3.995,6.622 v1@3.995,6.652 ; v1(4,6.6) v1@4,6.655 ; Q2.GH 7.801,5.386 7.872,5.386 v1(7.92,5.339)
  Bottom Layer w0.2: v1(4,6.6) 4,6.532 3.7,6.232 3.7,5.7 5.584,3.816 5.986,3.816 6.748,4.578 7.117,4.578 7.877,5.339 v1(7.92,5.339)
GHC: Q3.GH U2.16 | length 8.2
  Top Layer w0.2: U2.16 0.139,3.111 0.289,3.261 0.289,3.413 3.425,6.549 3.425,6.996 4.599,8.17 4.599,8.419 4.388,8.63 4.388,8.754 Q3.GH@4.411,8.777
GLA: Q1.GL U2.8 | length 5
  Top Layer w0.2: U2.8@3.43,0.811 3.702,0.811 4.047,0.466 6.724,0.466 7.139,0.881 7.881,0.881 Q1.GL@8.026,1.025
GLB: Q2.GL U2.13 | length 7.1
  Top Layer w0.2: U2.13 1.664,2.536 1.664,2.98 2.38,3.695 v1(2.393,3.695) ; Q2.GL v1(6.24,3.058)
  Bottom Layer w0.2: v1(2.393,3.695) 3.567,3.695 3.835,3.963 4.941,3.963 5.438,3.466 5.833,3.466 v1(6.24,3.058)
GLC: Q3.GL U2.18 | length 5.7
  Top Layer w0.2: U2.18 -0.811,2.561 -0.811,2.923 -0.561,3.173 -0.561,3.552 2.44,6.553 Q3.GL
GND: C1.2 C2.2 C3.2 C4.2 C7.2 C8.2 C10.1 C11.1 C12.1 C14.2 C20.2 C22.2 C23.2 C24.2 C25.2 C26.2 C27.2 C28.2 C29.2 C31.2 J1.1 J2.1 J2.8 J2.SH J3.1 J4.1 J11.1 NT4.1 NT5.1 NT6.1 R1.2 R7.2 R8.2 R13.2 U1.8 U1.10 U1.17 U1.18 U2.32 U2.40 U2.41 U4.14 U4.16 U4.32 U4.33 | length 7.3
  Top Layer w0.2: NT4.1 5.075,1.95 5.275,2.151 5.275,2.432 v1(5.25,2.457)
  Top Layer w0.3: v1(-7.4,7.9) -7.25,8.029 -6.629,8.565 cw(c-6.4,8.3) -6.545,8.619 -5.119,9.267 cw(c-4.881,8.743) -4.864,9.318 -3.733,9.284 cw(c-3.75,8.709) -3.278,9.037 -2.999,8.635 -2.75,8.177 v1(-2.6,7.9)
  Bottom Layer w0.3: v1(2.2,1.6) 2.229,1.629 2.229,1.884 C1.2
  other v1: -13,-9.5 -11.7,-9.5 9.65,-9.5 10.75,-9.5 11.85,-9.5 12.95,-9.5 10.2,-8.9 11.3,-8.9 12.4,-8.9 -13,-8.3 -11.7,-8.3 9.65,-8.3 10.75,-8.3 11.85,-8.3 12.95,-8.3 10.5,-7.3 10.1,-6.5 11.2,-5.5 -9.4,-5 10.8,-4.7 -2.374,-4.679 11.9,-3.7 -9.175,-3.129 -7.76,-3.129 -6.346,-3.129 11.5,-2.9 -1.542,-2.46 0.4,-2.275 2.157,-2.157 8.026,-2.157 -10.975,-2.075 12.4,-2 -9.175,-1.715 -7.76,-1.715 -6.361,-1.719 7.849,-1.414 6.701,-1.397 12,-1.2 0.547,-0.547 -9.175,-0.301 -7.76,-0.301 -6.346,-0.301 -0.55,0.55 11.6,1.1 -1.425,1.225 -4.546,1.346 -10.875,1.425 11.5,2.1 -5.999,2.7 -10.1,2.85 -8.6,2.86 -7.825,2.85 4.632,3.288 6.965,3.96 -0.119,7.994 6.1,8.3 0.525,8.9 0.971,9.596
ISENA: C7.1 R2.1 U4.5 | length 2
  Top Layer w0.2: U4.5 -7.96,0.835 -7.96,1.65 C7.1 R2.1
ISENB: C8.1 R3.1 U4.6 | length 2
  Top Layer w0.2: R3.1 C8.1 -8.521,1.65 -8.521,0.835 U4.6
LED: R6.2 U4.8 | length 1.6
  Top Layer w0.2: R6.2 U4.8
MISO: R4.2 U1.7 U2.26 U4.27 | length 7.4
  Top Layer w0.2: U4.27 -5.373,-2.471 -5.087,-2.519 cw(c-5.14,-2.845) -5.078,-2.521 v1@-4.748,-2.584 ; v1(-4.141,-1.237) -3.366,-0.731 cw(c-3.079,-1.171) -3.073,-0.646 -2.711,-0.646 U2.26
  Bottom Layer w0.2: v1@-4.748,-2.584 v1(-4.141,-1.237) v1@-4.093,-1.14 ; v1@-4.191,-1.237 v1@-4.093,-1.14 ; U1.7 -1.725,0.25 -2.731,-0.082 -3.369,-0.292 ccw(c-3.079,-1.171) -3.59,-0.4 ccw(c-3.079,-1.171) -3.91,-0.765 v1@-4.093,-1.14
  other v1: -4.748,-2.559
MISO2: J5.1 U4.11 | length 12.9
  Top Layer w0.2: U4.11 -10.31,-1.015 -10.38,-1.015 ccw(c-10.38,-1.345) -10.414,-1.016 -11.276,-1.104 ccw(c-11.2,-1.85) -11.95,-1.83 -12,-3.639 ccw(c-11.24,-3.66) -12,-3.66 -12,-5.142 ccw(c-11.24,-5.14) -11.532,-5.842 -6.985,-7.723 cw(c-7.1,-8) -6.879,-7.797 -6.6,-8.1 J5.1
MOSI: U1.4 U2.27 U4.28 | length 5.7
  Top Layer w0.2: U4.28 -5.21,-2.015 -5.14,-2.015 cw(c-5.14,-2.345) -5.122,-2.015 -4.867,-2.029 ccw(c-4.838,-1.505) -4.649,-1.995 -3.952,-1.727 ccw(c-4.141,-1.237) -3.854,-1.677 v1(-3.079,-1.171) -2.711,-1.171 U2.27
  Bottom Layer w0.2: v1(-3.079,-1.171) -1.726,-1.175 ccw(c-1.725,-0.75) -1.725,-1.175 -0.75,-1.175 U1.4
MOSI2: J6.1 U4.12 | length 13.1
  Top Layer w0.2: U4.12 -10.31,-1.5 -11.2,-1.5 ccw(c-11.2,-1.85) -11.55,-1.84 -11.55,-1.844 -11.6,-3.648 ccw(c-11.24,-3.66) -11.6,-3.66 -11.6,-5.14 ccw(c-11.24,-5.14) -11.371,-5.475 -5.592,-7.72 cw(c-5.7,-8) -5.479,-7.797 -5.2,-8.1 J6.1
MOTA: MOTA.1 Q1.SW U2.7 | length 7.5
  Top Layer w0.2: U2.7@3.43,0.311 3.696,0.311 3.891,0.116 6.869,0.116 7.284,0.531 8.274,0.531 8.768,1.025 8.768,1.273 8.126,1.915 Q1.SW
  other v1: 8.238,2.086 7.6,3
MOTB: MOTB.1 Q2.SW U2.14 | length 6.3
  Top Layer w0.2: U2.14 1.139,3.26 3.836,5.957 4.084,5.957 4.726,5.315 Q2.SW
  other v1: 5.1,5.3 4.6,5.8
MOTC: MOTC.1 Q3.SW U2.17 | length 7.3
  Top Layer w0.2: U2.17 -0.311,2.561 -0.311,2.928 -0.211,3.028 -0.211,3.407 3.058,6.676 3.058,7.004 2.204,7.858 Q3.SW@2.204,8.002
  other v1: 2.8,7.6 2.1,8.3
NetC15_2: C15.2 U2.3 | length 2.2
  Top Layer w0.3: U2.3 3.853,-1.639 4.533,-2.319 4.701,-2.319 5.001,-2.619 C15.2
NetC16_1: C16.1 U2.2 | length 2
  Top Layer w0.3: U2.2 3.716,-2.139 4.101,-2.524 4.101,-3.536 C16.1
NetC16_2: C16.2 U2.1 | length 2.4
  Top Layer w0.3: C16.2 2.904,-4.742 2.904,-4.318 3.139,-4.083 3.139,-2.815 3.139,-2.639 U2.1
NetLED1_K: LED1.K R6.1 | length 1.4
  Top Layer w0.2: R6.1 -12.113,0.537 -12.113,1.438 LED1.K
nFAULT: U2.25 U4.31 | length 3
  Top Layer w0.2: U4.31 -5.086,-0.41 ccw(c-5.14,-0.085) -4.907,-0.318 -4.77,-0.181 cw(c-4.363,-0.587) -4.323,-0.014 U2.25
nRST: C31.1 J2.5 U4.4 | length 10.8
  Top Layer w0.2: U4.4 -7.46,0.835 -7.46,0.905 cw(c-7.13,0.905) -7.146,1.235 -6.818,1.25 ccw(c-6.835,1.61) -6.475,1.61 -6.475,1.65 C31.1 -6.175,2.05 v1(-5.329,2.189) ; J2.5 -5.198,8.336 cw(c-4.9,8.3) -5.112,8.513 v1(-4.881,8.743)
  Bottom Layer w0.2: v1(-5.329,2.189) -4.41,5.287 ccw(c-5.657,5.657) -4.384,5.921 -4.496,6.461 cw(c-3.982,6.568) -4.5,6.48 v1(-4.881,8.743)
NSS2: J10.1 U4.9 | length 12.6
  Top Layer w0.2: U4.9 -10.31,-0.015 -10.38,-0.015 ccw(c-10.38,-0.345) -10.472,-0.028 -11.629,-0.36 ccw(c-11.2,-1.85) -12.749,-1.807 -12.799,-3.62 ccw(c-11.24,-3.66) -12.8,-3.66 -12.8,-5.144 ccw(c-11.24,-5.14) -11.992,-6.507 -9.755,-7.737 cw(c-9.9,-8) -9.679,-7.797 -9.4,-8.1 J10.1
PS_CSn: U1.5 U4.21 | length 11.3
  Top Layer w0.2: U4.21 -7.46,-4.265 -7.46,-4.335 ccw(c-7.13,-4.335) -7.394,-4.533 -7.035,-5.012 ccw(c-6.13,-4.335) -6.13,-5.465 -5.89,-5.465 ccw(c-5.89,-4.335) -5.772,-5.458 -5.312,-5.41 ccw(c-5.409,-4.49) -5.11,-5.365 v1(-3.75,-4.9) v1@-3.75,-4.905
  Bottom Layer w0.2: v1(-3.75,-4.9) -1.214,-2.869 ccw(c-1.542,-2.46) -1.152,-2.81 -0.433,-2.009 ccw(c-0.75,-1.725) -0.325,-1.725 -0.325,-1.125 ccw(c-0.75,-1.125) -0.811,-0.704 -1.125,-0.75 U1.5
RX: J2.3 U4.30 | length 10.1
  Top Layer w0.2: U4.30 -5.21,-0.915 -5.14,-0.915 ccw(c-5.14,-0.585) -4.992,-0.879 v1(-4.441,-0.602) ; J2.3 -4.2,7.6 -4.2,7.5 ccw(c-3.9,7.5) -4.005,7.219 v1(-3.427,7.003)
  Bottom Layer w0.2: v1(-4.441,-0.602) -4.034,1.232 ccw(c-4.546,1.346) -4.024,1.289 -3.569,5.427 ccw(c-5.657,5.657) -3.567,5.446 -3.46,6.515 ccw(c-3.982,6.568) -3.458,6.533 v1(-3.427,7.003)
SCK: U1.12 U2.28 U4.26 | length 10.2
  Top Layer w0.2: U4.26 -5.21,-3.015 -5.14,-3.015 cw(c-5.14,-3.345) -5.064,-3.024 -4.87,-3.07 ccw(c-4.748,-2.559) -4.4,-2.952 v1(-3.608,-2.251) -3.242,-1.953 cw(c-2.781,-2.519) -3.219,-1.935 -2.979,-1.755 cw(c-2.781,-2.019) -2.781,-1.689 -2.711,-1.689 U2.28
  Bottom Layer w0.2: v1(-3.608,-2.251) -3.604,-1.169 cw(c-3.079,-1.171) -3.097,-0.646 -2.497,-0.625 ccw(c-2.51,-0.265) -2.349,-0.587 -1.915,-0.37 cw(c-1.725,-0.75) -1.764,-0.327 -0.373,-0.199 ccw(c-0.4,0.1) -0.188,-0.112 0.112,0.188 ccw(c-0.1,0.4) 0.149,0.232 0.75,1.125 U1.12
SCK2: J9.1 U4.10 | length 12.7
  Top Layer w0.2: U4.10 -10.31,-0.515 -10.38,-0.515 ccw(c-10.38,-0.845) -10.447,-0.521 -11.431,-0.723 ccw(c-11.2,-1.85) -12.35,-1.82 -12.4,-3.628 ccw(c-11.24,-3.66) -12.4,-3.66 -12.4,-5.142 ccw(c-11.24,-5.14) -11.724,-6.194 -8.375,-7.727 cw(c-8.5,-8) -8.279,-7.797 -8,-8.1 J9.1
SLA: NT1.1 Q1.SL R1.1
SLB: NT2.1 Q2.SL R7.1
SLC: NT3.1 Q3.SL R8.1
SNA: C17.2 NT4.2 U2.10 | length 1.3
  Top Layer w0.2: U2.10 4.136,1.861 4.225,1.95 4.275,1.95 4.425,2.1 C17.2
SNB: C18.2 NT5.2 U2.11 | length 1.5
  Top Layer w0.2: U2.11 2.639,2.661 2.689,2.711 2.839,2.711 2.903,2.775 C18.2
SNC: C19.2 NT6.2 U2.20 | length 5.5
  Top Layer w0.2: C19.2 C19.2@-2.125,3.575 ; U2.20 -1.861,3.261 -1.975,3.375 -1.975,3.425 C19.2@-2.125,3.575 ; NT6.2 -0.125,6.545 -1.825,4.845 -1.825,3.875 C19.2@-2.125,3.575
SOA: R2.2 U2.23 | length 5.8
  Top Layer w0.2: R2.2 -6.875,3.05 -6.875,3.1 cw(c-6.525,3.1) -6.525,3.45 -6.125,3.45 cw(c-6.125,3.1) -5.902,3.369 -3.246,1.178 ccw(c-2.781,1.741) -3.22,1.158 -3.072,1.047 -3.07,1.045 -2.978,0.977 ccw(c-2.781,1.241) -2.781,0.911 -2.711,0.911 U2.23
SOB: R3.2 U2.22 | length 8
  Top Layer w0.2: R3.2 -9.125,3.05 -9.125,3.1 cw(c-8.775,3.1) -8.837,3.444 -6.658,3.838 cw(c-6.525,3.1) -6.525,3.85 -6.125,3.85 cw(c-6.125,3.1) -5.646,3.677 -2.992,1.487 ccw(c-2.781,1.741) -2.781,1.411 -2.711,1.411 U2.22
SPA: C17.1 NT1.2 U2.9 | length 2.5
  Top Layer w0.2: U2.9 4.264,1.361 C17.1@4.425,1.2 ; C17.1 C17.1@4.425,1.2 ; NT1.2 4.575,1.35 C17.1@4.425,1.2
SPB: C18.1 NT2.2 U2.12 | length 1.7
  Top Layer w0.2: U2.12 2.189,2.561 2.189,2.999 2.306,3.116 2.744,3.116 C18.1@3.155,3.527
SPC: C19.1 NT3.2 U2.19 | length 4.9
  Top Layer w0.2: U2.19 -1.361,3.425 C19.1@-1.211,3.575 ; C19.1 C19.1@-1.211,3.575 ; NT3.2 -1.475,4.7 -1.475,3.825 -1.225,3.575 C19.1@-1.211,3.575
SWCLK: J2.6 U4.24 | length 14.6
  Top Layer w0.2: v1(-7.1,6.5) -6.308,6.864 ccw(c-6.6,7.5) -6.04,7.08 -5.86,7.32 ccw(c-6.1,7.5) -5.8,7.5 -5.8,7.6 J2.6 ; U4.24 -5.96,-3.965 -5.409,-3.965 cw(c-5.409,-4.49) -5.254,-3.989 v1(-4.656,-4.174)
  Bottom Layer w0.2: v1(-7.1,6.5) -6.519,2.622 ccw(c-5.999,2.7) -6.512,2.588 -6.213,1.215 ccw(c-5.7,1.327) -6.201,1.172 -5.427,-1.44 cw(c-6.002,-1.612) -5.424,-1.449 -5.422,-1.455 cw(c-6.361,-1.719) -5.411,-1.499 cw(c-5.8,-1.593) -5.41,-1.503 cw(c-6.36,-1.719) -5.394,-1.593 cw(c-5.791,-1.643) -5.393,-1.598 -5.27,-2.622 ccw(c-4.748,-2.559) -5.234,-2.758 v1(-4.656,-4.174)
SWDIO: J2.7 U4.23 | length 15.4
  Top Layer w0.2: v1(-7.3,7.2) -6.6,7.2 ccw(c-6.6,7.5) -6.3,7.5 -6.3,7.6 J2.7 ; U4.23 -6.46,-4.265 -6.46,-4.335 ccw(c-6.13,-4.335) -6.13,-4.665 -5.89,-4.665 ccw(c-5.89,-4.335) -5.762,-4.639 v1(-5.409,-4.49) v1@-5.393,-4.565
  Bottom Layer w0.2: v1(-7.3,7.2) -7.554,6.764 ccw(c-7.1,6.5) -7.622,6.442 -6.868,-0.358 ccw(c-6.346,-0.301) -6.703,-0.685 -6.004,-1.334 cw(c-6.361,-1.719) -5.842,-1.64 v1(-5.409,-4.49)
TIM1_CH1: U2.38 U4.18 | length 13.7
  Top Layer w0.2: U4.18 -8.96,-4.265 -8.96,-4.335 ccw(c-8.63,-4.335) -8.895,-4.532 -7.994,-5.733 ccw(c-6.13,-4.335) -6.13,-6.665 -5.89,-6.665 ccw(c-5.89,-4.335) -5.745,-6.66 -0.762,-6.348 ccw(c-0.838,-5.138) 0.095,-5.912 1.529,-4.185 ccw(c1.125,-3.85) 1.65,-3.85 1.65,-3.489 U2.38
TIM1_CH2: U2.36 U4.19 | length 12.1
  Top Layer w0.2: U4.19 -8.46,-4.265 -8.46,-4.335 ccw(c-8.13,-4.335) -8.395,-4.533 -7.673,-5.494 ccw(c-6.13,-4.335) -6.13,-6.265 -5.89,-6.265 ccw(c-5.89,-4.335) -5.77,-6.261 -0.787,-5.948 ccw(c-0.838,-5.138) -0.159,-5.585 0.563,-4.489 ccw(c0.125,-4.2) 0.639,-4.093 0.611,-3.955 cw(c1.125,-3.85) 0.6,-3.848 0.6,-3.489 U2.36
TIM1_CH3: U2.34 U4.20 | length 10.6
  Top Layer w0.2: U4.20 -7.96,-4.265 -7.96,-4.335 ccw(c-7.63,-4.335) -7.895,-4.532 -7.352,-5.256 ccw(c-6.13,-4.335) -6.13,-5.865 -5.89,-5.865 ccw(c-5.89,-4.335) -5.795,-5.862 -0.812,-5.549 ccw(c-0.838,-5.138) -0.425,-5.141 -0.411,-3.562 ccw(c-0.741,-3.559) -0.411,-3.559 -0.411,-3.489 U2.34
TX: J2.4 U4.29 | length 10.4
  Top Layer w0.2: U4.29 -5.21,-1.505 v1(-4.838,-1.505) ; J2.4 -4.7,7.6 -4.7,7.5 ccw(c-4.4,7.5) -4.64,7.32 -4.459,7.078 ccw(c-3.9,7.5) -4.409,7.02 v1(-3.982,6.568)
  Bottom Layer w0.2: v1(-4.838,-1.505) -4.96,-0.677 cw(c-4.441,-0.602) -4.965,-0.63 -5.071,1.319 cw(c-4.546,1.346) -5.029,1.552 -4.846,1.984 ccw(c-5.329,2.189) -4.82,2.06 -4.01,5.237 ccw(c-5.657,5.657) -3.958,5.705 v1(-3.982,6.568)
VDRAIN: NT7.2 U2.5 | length 5
  Top Layer w0.2: U2.5 3.331,-0.597 7.152,-0.597 7.378,-0.371 NT7.2
VSENVM: C26.1 R12.2 R13.1 U4.7 | length 3.6
  Top Layer w0.2: R12.2 R13.1 -10.675,2.225 -10.25,2.05 C26.1 -9.95,1.65 -9.912,1.513 ccw(c-9.565,1.61) -9.591,1.251 -9.366,1.234 cw(c-9.39,0.905) -9.06,0.905 -9.06,0.835 U4.7
pads on no net: C1.0 C2.0 C3.0 C4.0 C7.0 C8.0 C10.0 C11.0 C12.0 C14.0 C15.0 C16.0 C17.0 C18.0 C19.0 C20.0 C22.0 C23.0 C24.0 C25.0 C26.0 C27.0 C28.0 C29.0 C31.0 FB2.0 LED1.0 R1.0 R2.0 R3.0 R4.0 R6.0 R7.0 R8.0 R12.0 R13.0 U1.1 U1.2 U1.9 U1.15 U1.16 U2.21 U2.31 U4.2 U4.3 U4.13
copper on no net:
  other v1: 2,-5.7

## Polygon pours and split planes (outlines as drawn)
+3.3 on PWR "+3.3_L03_P002" (solid, remove dead copper, pour order 2): -13.5,-10 -13.5,12.982 -2.962,13.358 0,10.5 0,7 4,3 4,-10
+16 on PWR "+16_L03_P001" (solid, remove dead copper, pour order 1): 2.1,11.1 3.9,11.1 11,4 11,-10 4.7,-10 4.7,3.7 1.7,6.7 1.7,10.7
GND on Top Layer "GND_L01_P015" (solid, remove dead copper, pour order 15): -13.5,13.5 13.5,13.5 13.5,-11.6 -13.5,-11.6
SLA on Top Layer "SLA_L01_P009" (solid, remove dead copper, pour order 9): 8.061,1.556 6.718,2.899 6.2,2.382 6.2,1.075 6.89,0.385
SLC on Top Layer "SLC_L-01_P-001" (solid, remove dead copper, pour order 11): 1.062,8.562 2.3,7.325 1.9,6.925 1.075,6.1 0.437,6.737 0.725,7.025 0.725,8.225
+16 on Top Layer "+16_L01_P013" (solid, remove dead copper, pour order 13): 3,-1.475 4,-1.475 5.7,-3.175 5.7,-7.8 5.5,-8 5.5,-10 9,-10 9,-7.895 11,-2.288 11,2.702 8.69,5.013 2.351,11.351 1.22,10.22 1.76,9.68 9.467,1.972 9.467,0.992 8,-0.475 3,-0.475
SLB on Top Layer "SLB_L01_P010" (solid, remove dead copper, pour order 10): 3.96,5.657 2.828,4.525 3.182,4.172 4.879,4.172 5.162,4.455
GND on Bottom Layer "GND_L04_P014" (solid, remove dead copper, pour order 14): -13.5,-12 -13.5,13.5 13.5,13.5 13.5,-12
MOTC on Bottom Layer "MOTC_L04_P008" (solid, remove dead copper, pour order 8): 1.131,8.768 3.367,6.533 5.248,8.415 6.01,8.415 7.495,9.899 5.657,11.738 4.596,10.677 3.041,10.677
MOTB on Bottom Layer "MOTB_L04_P006" (solid, remove dead copper, pour order 6): 4.031,5.869 7.778,9.617 9.617,7.778 5.869,4.031
MOTA on Bottom Layer "MOTA_L04_P007" (solid, remove dead copper, pour order 7): 6.859,3.041 8.344,4.525 8.344,5.94 9.899,7.495 11.738,5.657 10.607,4.525 10.607,3.111 8.697,1.202
GND on GND "GND_L02_P000" (solid, remove dead copper, pour order 0): -13.5,-11.6 -13.5,13.5 13.5,13.5 13.5,-11.6

## Other copper
Top Layer:
  pour cut-out: 0.6,8 0.6,6.8 -0.2,6.8 -0.2,8
  pour cut-out: 4.5,4 5,4 6.25,2.75 5,1.5 3.5,3

## Silkscreen, mask and mechanical layers (free items; w line width, h text height)
Top Solder:
  rectangle: -3,11.5 3,13.5
M1 Board Outline:
  the board outline again, w0.1
Mechanical 3:
  circle w0.2: c0,0 r5.3
  circle w0.1: c0,0 r17.5
  circle w0.1: c0,0 r13.75
  lines w0.1: -2.5,11 -2.5,14 2.5,14 2.5,11 -2.5,11